# EAGLE board avrshift (EAGLE 6.6.0)
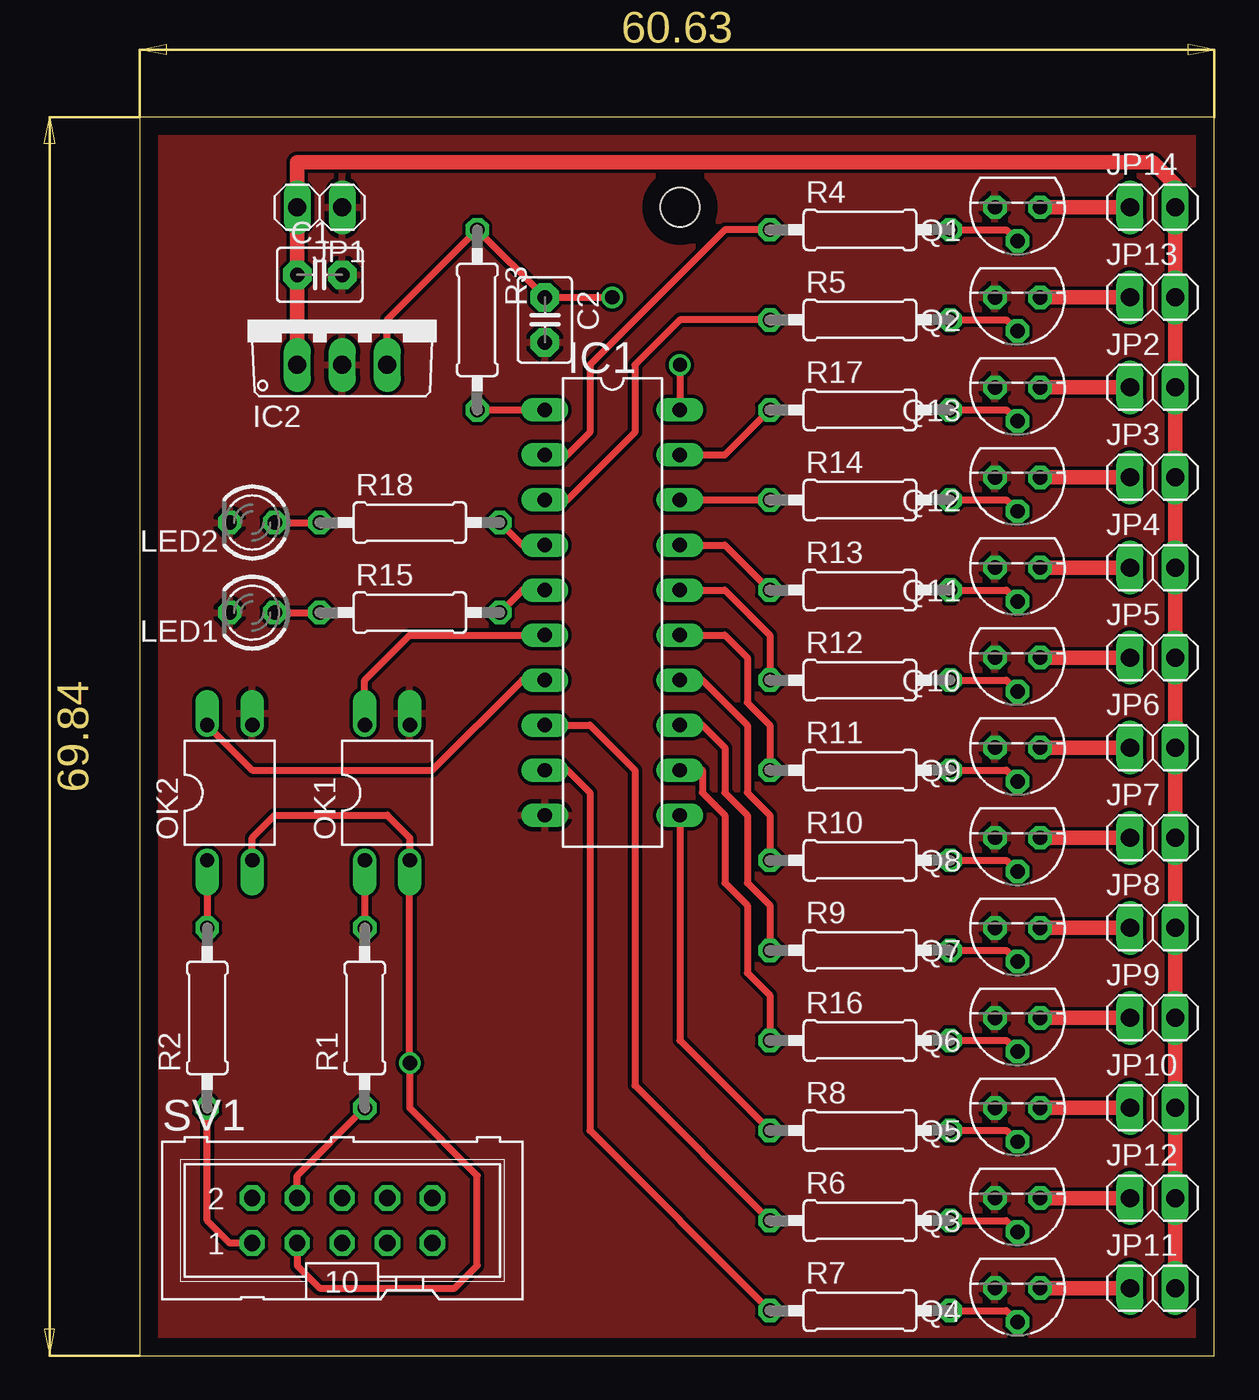
[diagram p0: board, top side]
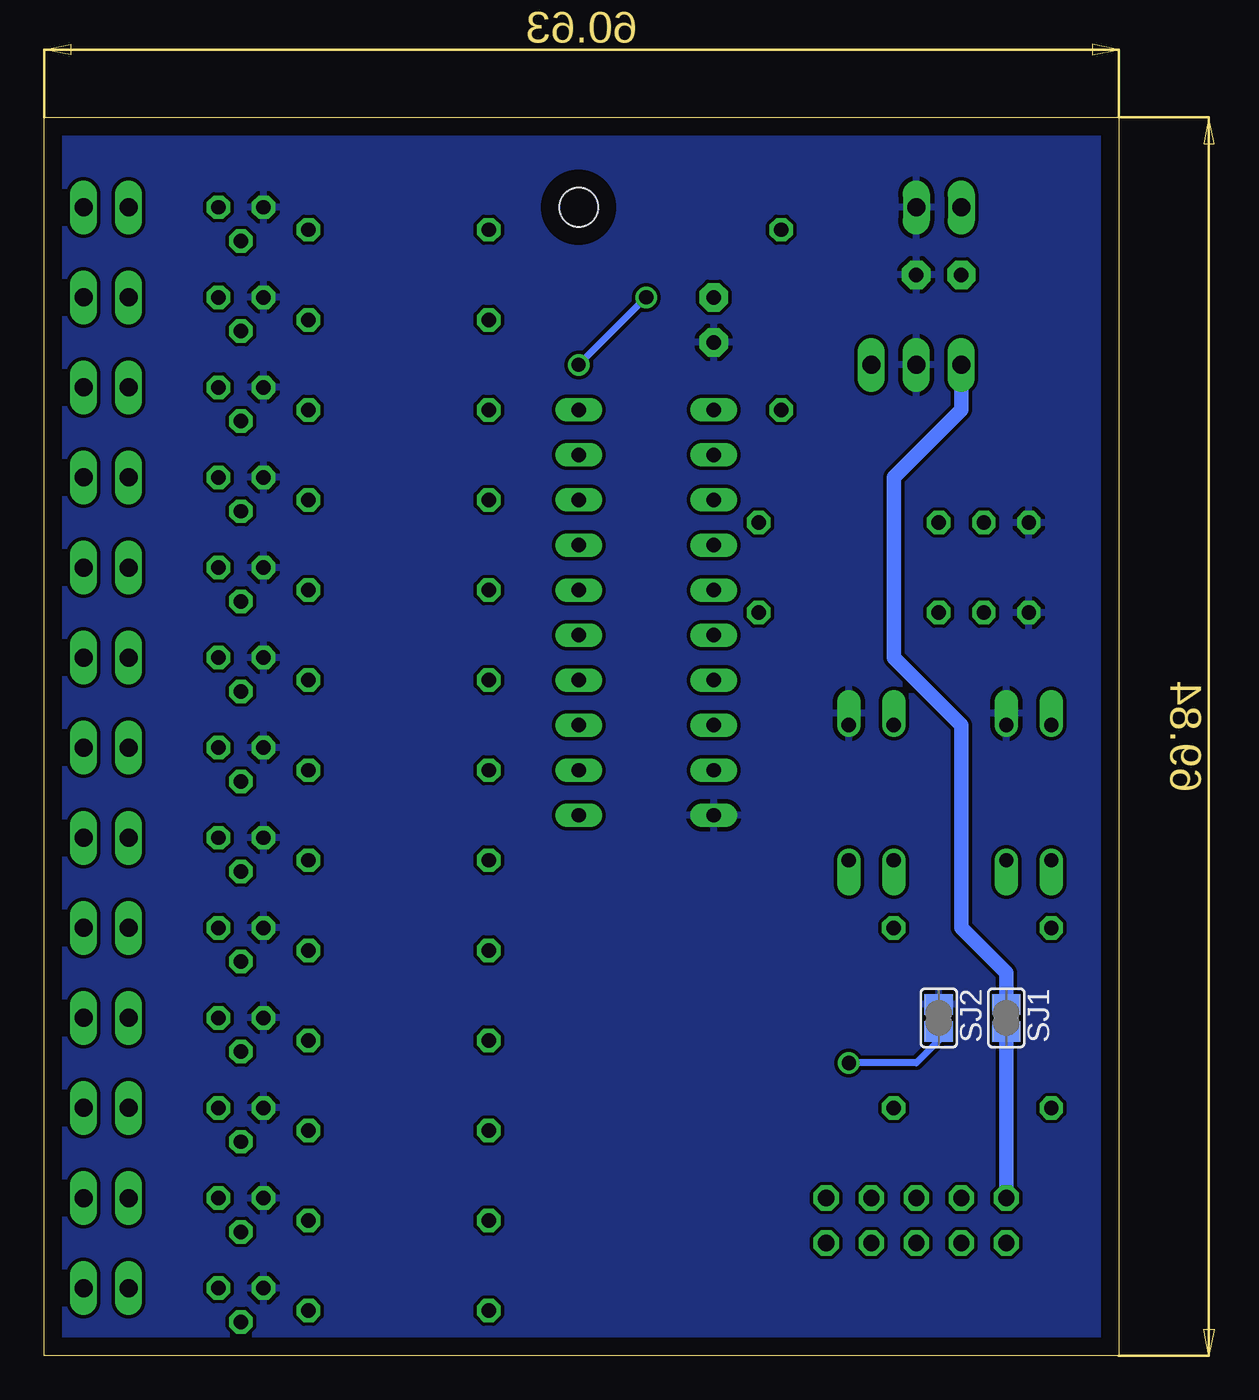
[diagram p1: board, bottom side, seen from below]

Size 60.63 x 69.84 mm. Coordinates in mm from the lower left corner, seen from the top.
Outline: 0,0 60.63,0 60.63,69.84 0,69.84 0,0
Copper layers (1*16): Top 0.035mm / dielectric 1.5mm / Bottom 0.035mm
Design rules "default": minimum track width 10mil, minimum drill 24mil, track to track 8mil, track to pad 8mil, pad to pad 8mil, via to via 8mil, smd to smd 8mil, copper to edge 40mil, drill to drill 8mil, minimum pad ring 10mil, minimum via ring 8mil, stop-mask expansion 4mil, vias tented up to drill 0mil, thermal gap 10mil
Holes 2.2 mm at 30.48,64.77

## Footprints (pad centres in the part's own frame; a part is rotated, then mirrored left to right if it is on the bottom)
C2.5-3 = drill 0.813 pad 1.6 octagon: 1 -1.27,0; 2 1.27,0
DIL20 = drill 0.813 long: 1 -11.43,-3.81; 2 -8.89,-3.81; 3 -6.35,-3.81; 4 -3.81,-3.81; 5 -1.27,-3.81; 6 1.27,-3.81; 7 3.81,-3.81; 8 6.35,-3.81; 9 8.89,-3.81; 10 11.43,-3.81; 11 11.43,3.81; 12 8.89,3.81; 13 6.35,3.81; 14 3.81,3.81; 15 1.27,3.81; 16 -1.27,3.81; 17 -3.81,3.81; 18 -6.35,3.81; 19 -8.89,3.81; 20 -11.43,3.81
TO220V = drill 1.016 long: 1 -2.54,-2.54; 2 0,-2.54; 3 2.54,-2.54
1X02 = drill 1.016 long: 1 -1.27,0; 2 1.27,0
LED3MM = drill 0.813 octagon: A -1.27,0; K 1.27,0
DIL04 = drill 0.813 offset: 1 -1.27,-3.81; 2 1.27,-3.81; 3 1.27,3.81; 4 -1.27,3.81
TO92 = drill 0.813 octagon: 1 1.27,0; 2 0,1.905; 3 -1.27,0
0207/10 = drill 0.813 octagon: 1 -5.08,0; 2 5.08,0
SJ = smd 1.168 x 1.6: 1 -0.762,0; 2 0.762,0
ML10 = drill 0.914 octagon: 1 -5.08,-1.27; 2 -5.08,1.27; 3 -2.54,-1.27; 4 -2.54,1.27; 5 0,-1.27; 6 0,1.27; 7 2.54,-1.27; 8 2.54,1.27; 9 5.08,-1.27; 10 5.08,1.27

## Placement (x,y rotation side)
C1  330nF  [C2.5-3]  10.16,60.96 0 top
C2  100nF  [C2.5-3]  22.86,58.42 270 top
IC1  AT90S2313P  [DIL20]  26.67,41.91 270 top
IC2  7805TV  [TO220V]  11.43,58.42 0 top
JP1  PWR  [1X02]  10.16,64.77 180 top
JP2  [1X02]  57.15,54.61 0 top
JP3  [1X02]  57.15,49.53 0 top
JP4  [1X02]  57.15,44.45 0 top
JP5  [1X02]  57.15,39.37 0 top
JP6  [1X02]  57.15,34.29 0 top
JP7  [1X02]  57.15,29.21 0 top
JP8  [1X02]  57.15,24.13 0 top
JP9  [1X02]  57.15,19.05 0 top
JP10  [1X02]  57.15,13.97 0 top
JP11  [1X02]  57.15,3.81 0 top
JP12  [1X02]  57.15,8.89 0 top
JP13  [1X02]  57.15,59.69 0 top
JP14  [1X02]  57.15,64.77 0 top
LED1  PWR  [LED3MM]  6.35,41.91 180 top
LED2  ACT  [LED3MM]  6.35,46.99 180 top
OK1  PC817  [DIL04]  13.97,31.75 0 top
OK2  PC817  [DIL04]  5.08,31.75 0 top
Q1  BC337-40  [TO92]  49.53,64.77 180 top
Q2  BC337-40  [TO92]  49.53,59.69 180 top
Q3  BC337-40  [TO92]  49.53,8.89 180 top
Q4  BC337-40  [TO92]  49.53,3.81 180 top
Q5  BC337-40  [TO92]  49.53,13.97 180 top
Q6  BC337-40  [TO92]  49.53,19.05 180 top
Q7  BC337-40  [TO92]  49.53,24.13 180 top
Q8  BC337-40  [TO92]  49.53,29.21 180 top
Q9  BC337-40  [TO92]  49.53,34.29 180 top
Q10  BC337-40  [TO92]  49.53,39.37 180 top
Q11  BC337-40  [TO92]  49.53,44.45 180 top
Q12  BC337-40  [TO92]  49.53,49.53 180 top
Q13  BC337-40  [TO92]  49.53,54.61 180 top
R1  1K  [0207/10]  12.7,19.05 90 top
R2  1K  [0207/10]  3.81,19.05 90 top
R3  10K  [0207/10]  19.05,58.42 270 top
R4  3K3  [0207/10]  40.64,63.5 0 top
R5  3K3  [0207/10]  40.64,58.42 0 top
R6  3K3  [0207/10]  40.64,7.62 0 top
R7  3K3  [0207/10]  40.64,2.54 0 top
R8  3K3  [0207/10]  40.64,12.7 0 top
R9  3K3  [0207/10]  40.64,22.86 0 top
R10  3K3  [0207/10]  40.64,27.94 0 top
R11  3K3  [0207/10]  40.64,33.02 0 top
R12  3K3  [0207/10]  40.64,38.1 0 top
R13  3K3  [0207/10]  40.64,43.18 0 top
R14  3K3  [0207/10]  40.64,48.26 0 top
R15  470  [0207/10]  15.24,41.91 0 top
R16  3K3  [0207/10]  40.64,17.78 0 top
R17  3K3  [0207/10]  40.64,53.34 0 top
R18  470  [0207/10]  15.24,46.99 0 top
SJ1  BUSPWR  [SJ]  6.35,19.05 270 bottom
SJ2  BUSPWR  [SJ]  10.16,19.05 270 bottom
SV1  SI2C  [ML10]  11.43,7.62 0 top

## Library data of the parts
C1 C2 = capacitor-wima
IC1 = atmel; OC_FARNELL: unknown; OC_NEWARK: unknown
IC2 = linear
JP1-JP14 = pinhead
LED1 LED2 = led
OK1 OK2 = optocoupler; MPN: PC817X4J000F; OC_FARNELL: 9707727; OC_NEWARK: 97K7059
Q1-Q13 = transistor-npn
R1-R18 = resistor
SJ1 SJ2 = jumper
SV1 = con-harting-ml; OC_FARNELL: unknown; OC_NEWARK: unknown

## Nets
5V: C2.1 IC1.20 IC2.3 R3.1
AVRO01: IC1.2 R4.1
AVRO02: IC1.3 R5.1
AVRO03: IC1.8 R6.1
AVRO04: IC1.9 R7.1
AVRO05: IC1.11 R8.1
AVRO06: IC1.12 R16.1
AVRO07: IC1.13 R9.1
AVRO08: IC1.14 R10.1
AVRO09: IC1.15 R11.1
AVRO10: IC1.16 R12.1
AVRO11: IC1.17 R13.1
AVRO12: IC1.18 R14.1
AVRO13: IC1.19 R17.1
AVRSCL: IC1.6 OK1.4
AVRSDA: IC1.7 OK2.4
BUSGND: OK1.2 OK2.2 SJ2.2 SV1.3
BUSVCC: SJ1.2 SV1.2
GND: C1.2 C2.2 IC1.10 IC2.2 JP1.1 LED1.K LED2.K OK1.3 OK2.3 Q1.1 Q2.1 Q3.1 Q4.1 Q5.1 Q6.1 Q7.1 Q8.1 Q9.1 Q10.1 Q11.1 Q12.1 Q13.1 SJ2.1
N$1: OK1.1 R1.2
N$3: IC1.1 R3.2
N$4: OK2.1 R2.2
N$5: Q13.2 R17.2
N$6: JP13.1 Q2.3
N$7: JP2.1 Q13.3
N$8: LED2.A R18.1
N$9: Q1.2 R4.2
N$10: LED1.A R15.1
N$11: Q2.2 R5.2
N$12: Q3.2 R6.2
N$13: Q4.2 R7.2
N$14: Q5.2 R8.2
N$15: Q7.2 R9.2
N$16: Q8.2 R10.2
N$17: Q9.2 R11.2
N$18: Q10.2 R12.2
N$19: Q11.2 R13.2
N$20: Q12.2 R14.2
N$21: IC1.4 R18.2
N$22: Q6.2 R16.2
N$23: JP3.1 Q12.3
N$33: IC1.5 R15.2
N$37: JP14.1 Q1.3
N$39: JP12.1 Q3.3
N$40: JP11.1 Q4.3
N$41: JP10.1 Q5.3
N$42: JP9.1 Q6.3
N$43: JP8.1 Q7.3
N$44: JP7.1 Q8.3
N$45: JP6.1 Q9.3
N$46: JP5.1 Q10.3
N$47: JP4.1 Q11.3
SCL: R1.1 SV1.4
SDA: R2.1 SV1.1
VCC: C1.1 IC2.1 JP1.2 JP2.2 JP3.2 JP4.2 JP5.2 JP6.2 JP7.2 JP8.2 JP9.2 JP10.2 JP11.2 JP12.2 JP13.2 JP14.2 SJ1.1

## Tracks (layer width: path | path; a pad name or v marks a point on that pad's centre or on a via)
5V  (via drill 0.8)
  Top 0.406: IC2.3 13.97,58.42 R3.1 C2.1 v26.67,59.69 | v30.48,55.88 IC1.20
  Bottom 0.406: v26.67,59.69 v30.48,55.88
AVRO01
  Top 0.406: R4.1 33.02,63.5 25.4,55.88 25.4,52.07 24.13,50.8 IC1.2
AVRO02
  Top 0.406: R5.1 30.48,58.42 27.94,55.88 27.94,52.07 24.13,48.26 IC1.3
AVRO03
  Top 0.406: IC1.8 25.4,35.56 27.94,33.02 27.94,15.24 R6.1
AVRO04
  Top 0.406: IC1.9 24.13,33.02 25.4,31.75 25.4,12.7 R7.1
AVRO05
  Top 0.406: IC1.11 30.48,17.78 R8.1
AVRO06
  Top 0.406: IC1.12 31.75,33.02 31.75,31.75 33.02,30.48 33.02,26.67 34.29,25.4 34.29,21.59 35.56,20.32 R16.1
AVRO07
  Top 0.406: IC1.13 31.75,35.56 33.02,34.29 33.02,31.75 34.29,30.48 34.29,26.67 35.56,25.4 R9.1
AVRO08
  Top 0.406: IC1.14 31.75,38.1 34.29,35.56 34.29,31.75 35.56,30.48 R10.1
AVRO09
  Top 0.406: IC1.15 33.02,40.64 34.29,39.37 34.29,36.83 35.56,35.56 R11.1
AVRO10
  Top 0.406: IC1.16 33.02,43.18 35.56,40.64 R12.1
AVRO11
  Top 0.406: IC1.17 33.02,45.72 R13.1
AVRO12
  Top 0.406: IC1.18 R14.1
AVRO13
  Top 0.406: IC1.19 33.02,50.8 R17.1
AVRSCL
  Top 0.406: OK1.4 12.7,38.1 15.24,40.64 IC1.6
AVRSDA
  Top 0.406: OK2.4 6.35,33.02 16.51,33.02 21.59,38.1 IC1.7
BUSGND  (via drill 0.8)
  Top 0.406: SV1.3 8.89,5.08 10.16,3.81 17.78,3.81 19.05,5.08 19.05,10.16 15.24,13.97 v15.24,16.51 OK1.2 15.24,29.21 13.97,30.48 7.62,30.48 6.35,29.21 OK2.2 6.35,26.67
  Bottom 0.406: SJ2.2 10.16,17.78 11.43,16.51 v15.24,16.51
BUSVCC
  Bottom 0.813: SV1.2 SJ1.2
GND
  pour Top: 0,69.85 60.96,69.85 60.96,0 0,0
  pour Bottom: 0,0 0,69.85 60.96,69.85 60.96,0
N$1
  Top 0.406: OK1.1 R1.2
N$3
  Top 0.406: R3.2 IC1.1
N$4
  Top 0.406: OK2.1 R2.2
N$5
  Top 0.406: R17.2 48.9,53.34 Q13.2
N$6
  Top 0.813: JP13.1 Q2.3
N$7
  Top 0.813: Q13.3 JP2.1
N$8
  Top 0.406: LED2.A R18.1
N$9
  Top 0.406: R4.2 48.9,63.5 Q1.2
N$10
  Top 0.406: LED1.A R15.1
N$11
  Top 0.406: R5.2 48.9,58.42 Q2.2
N$12
  Top 0.406: R6.2 48.9,7.62 Q3.2
N$13
  Top 0.406: R7.2 48.9,2.54 Q4.2
N$14
  Top 0.406: R8.2 48.9,12.7 Q5.2
N$15
  Top 0.406: R9.2 48.9,22.86 Q7.2
N$16
  Top 0.406: R10.2 48.9,27.94 Q8.2
N$17
  Top 0.406: R11.2 48.9,33.02 Q9.2
N$18
  Top 0.406: R12.2 48.9,38.1 Q10.2
N$19
  Top 0.406: R13.2 48.9,43.18 Q11.2
N$20
  Top 0.406: R14.2 48.9,48.26 Q12.2
N$21
  Top 0.406: R18.2 21.59,45.72 IC1.4
N$22
  Top 0.406: R16.2 48.9,17.78 Q6.2
N$23
  Top 0.813: Q12.3 JP3.1
N$33
  Top 0.406: R15.2 21.59,43.18 IC1.5
N$37
  Top 0.813: JP14.1 Q1.3
N$39
  Top 0.813: JP12.1 Q3.3
N$40
  Top 0.813: JP11.1 Q4.3
N$41
  Top 0.813: Q5.3 JP10.1
N$42
  Top 0.813: Q6.3 JP9.1
N$43
  Top 0.813: Q7.3 JP8.1
N$44
  Top 0.813: Q8.3 JP7.1
N$45
  Top 0.813: Q9.3 JP6.1
N$46
  Top 0.813: Q10.3 JP5.1
N$47
  Top 0.813: Q11.3 JP4.1
SCL
  Top 0.406: SV1.4 8.89,10.16 R1.1
SDA
  Top 0.406: SV1.1 5.08,6.35 3.81,7.62 R2.1
VCC
  Top 0.813: JP13.2 58.42,60.96 | JP13.2 JP14.2 58.42,66.04 57.15,67.31 8.89,67.31 JP1.2 C1.1 IC2.1 | JP13.2 JP2.2 JP3.2 JP4.2 JP5.2 JP6.2 JP7.2 JP8.2 JP9.2 JP10.2 JP12.2 JP11.2
  Bottom 0.813: IC2.1 8.89,53.34 12.7,49.53 12.7,39.37 8.89,35.56 8.89,24.13 6.35,21.59 SJ1.1